# Altium PCB kursa4.PcbDoc
Units mm, origin at the board's own origin, x right, y up, seen from the top; angles counter-clockwise.
Board outline 105 x 80 mm, 2 copper layers (Top Layer, Bottom Layer); 32 components, 25 nets, 110 pads, 0 vias.
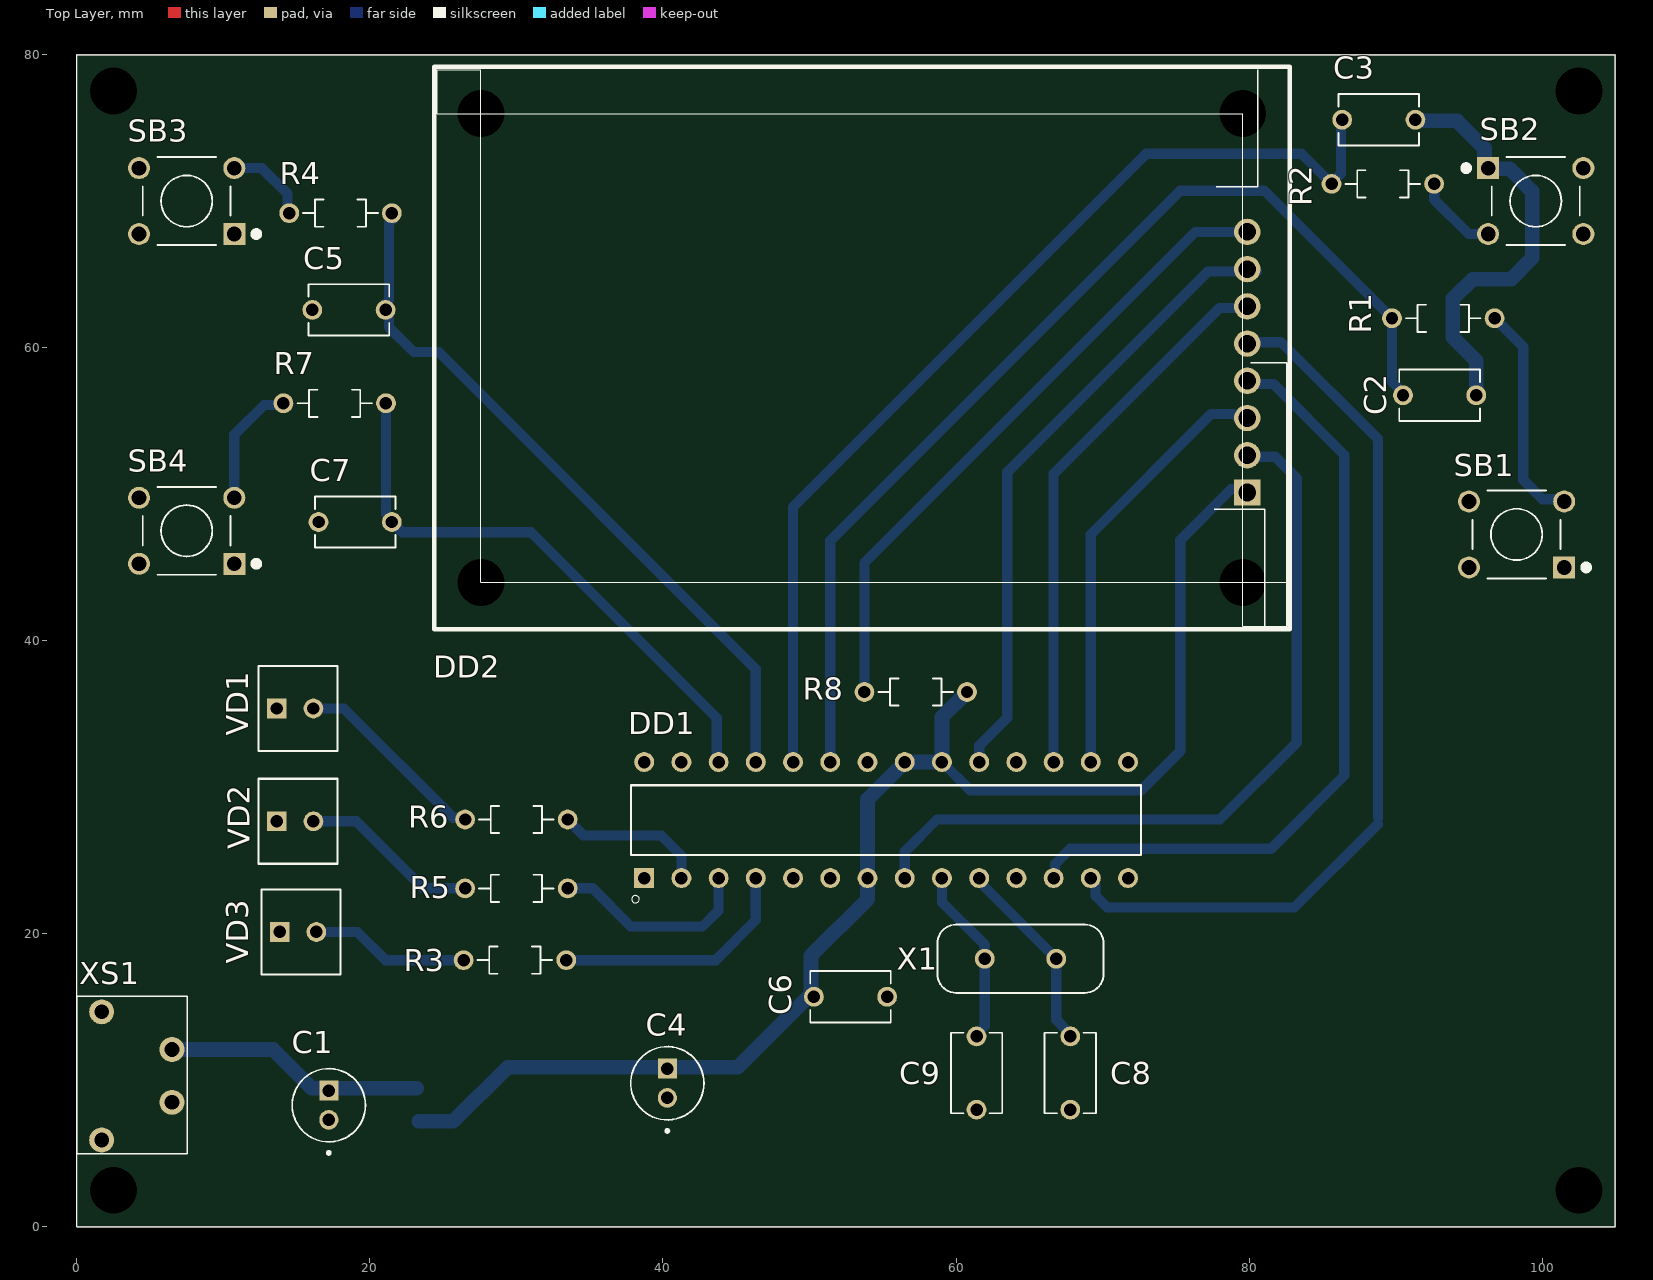
[diagram p0: Top Layer view]
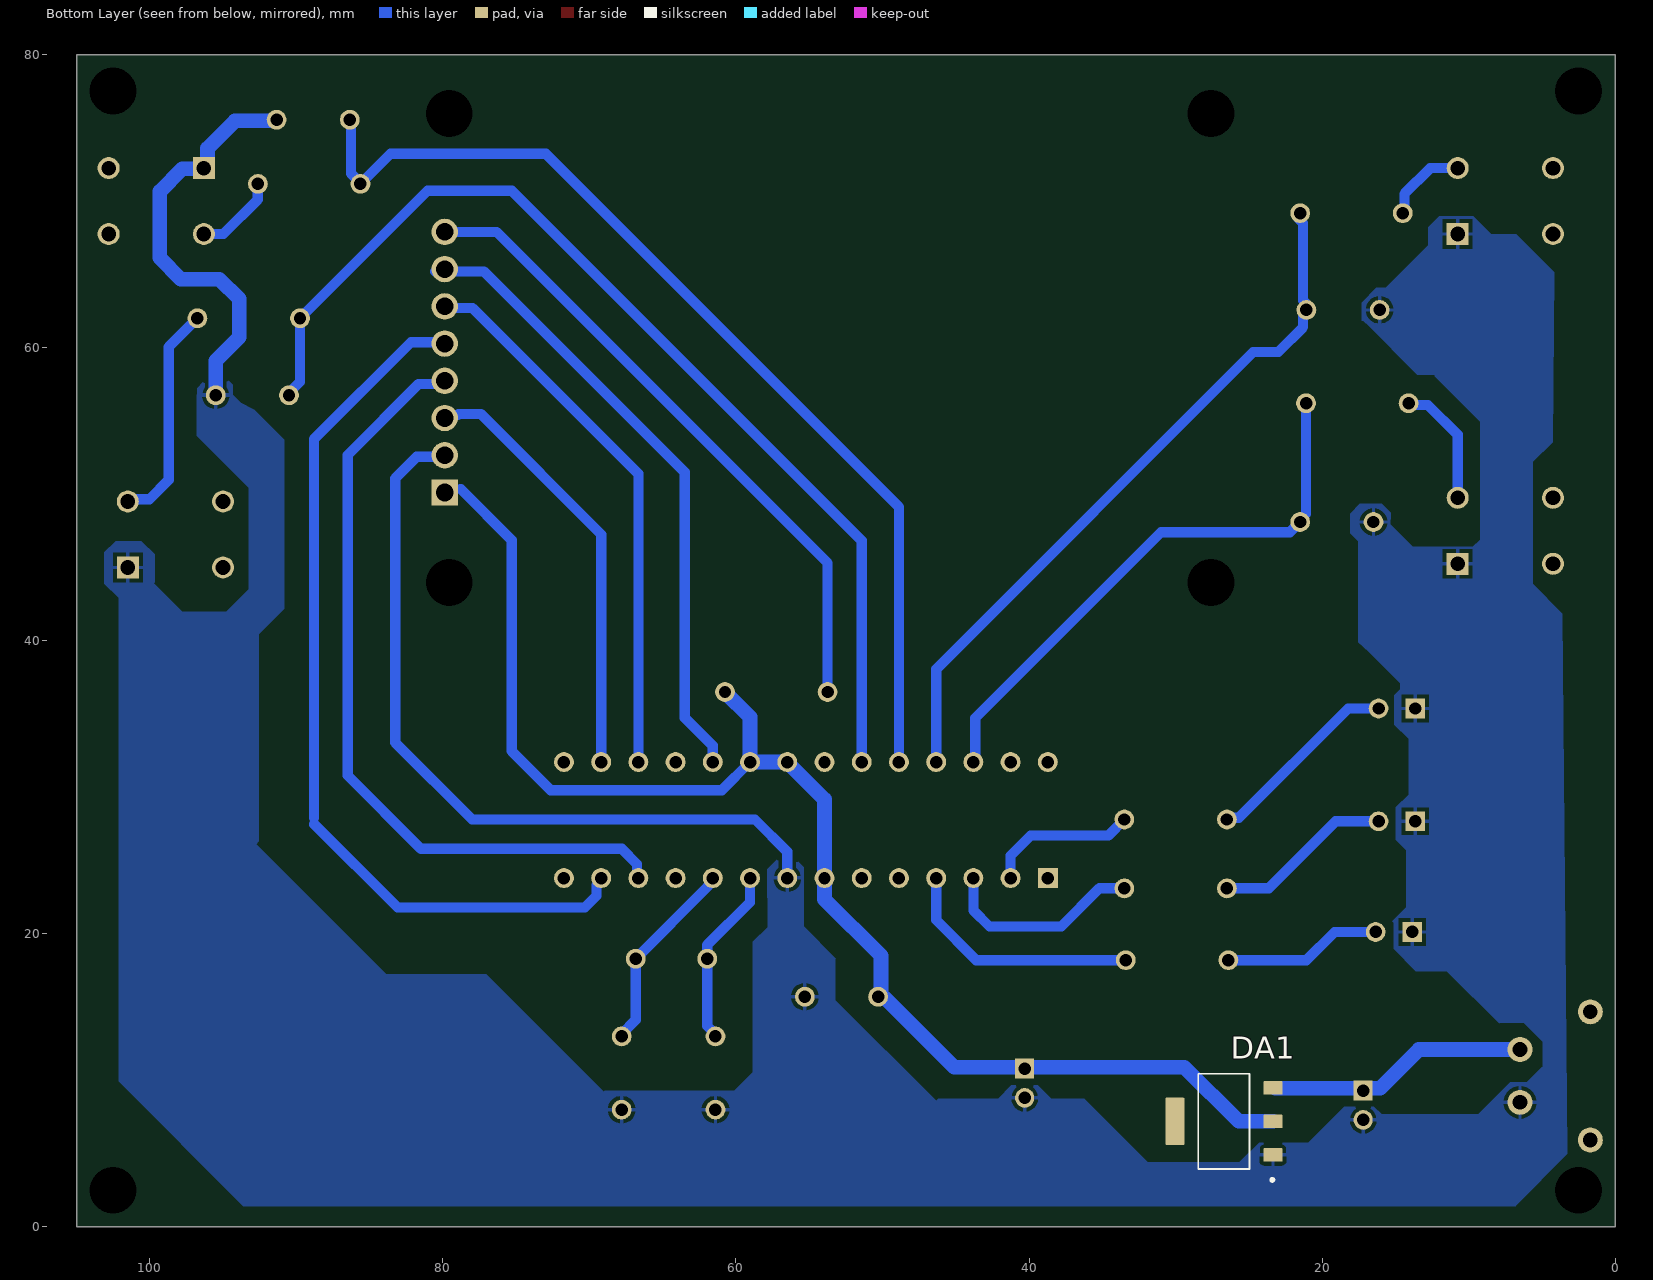
[diagram p1: Bottom Layer view, seen from below]

## Layer stack, top to bottom
Top Solder: solder mask 0.0102, Solder Resist, Dk 3.5
Top Layer: signal copper 0.0356
Dielectric 1: dielectric 0.32, FR-4, Dk 4.8
Bottom Layer: signal copper 0.0356
Bottom Solder: solder mask 0.0102, Solder Resist, Dk 3.5

## Board outline
0,0 0,80 105,80 105,0

## Design rules (kind name [scope] priority, off if disabled: settings)
Clearance [All] p1: gap=0.254 ignorepadtopadclearanceinfootprint=FALSE
PolygonConnect [All] p1: connectstyle=Relief reliefconductorwidth=0.254 reliefentries=4 polygonreliefangle="90 Angle" airgapwidth=0.254
RoutingVias [All] p1: holewidth=0.711 width=1.27 viastyle="Through Hole" minholewidth=0.711 minwidth=1.27 maxholewidth=0.711 maxwidth=1.27
SolderMaskExpansion [All] p1: expansion=0.102 istentingtop=FALSE
Width [All] p1: maxlimit=1 minlimit=0.7 preferedwidth=0.7
30 further rules are at their usual default settings.

## Classes and differential pairs
component class schema: C1 C2 C3 C4 C5 C6 C7 C8 C9 DA1 DD1 DD2 R1 R2 R3 R4 R5 R6 R7 R8 SB1 SB2 SB3 SB4 VD1 VD2 VD3 X1 XS1

## Components (designator, comment, footprint, x,y, rotation, side; value= is the part's Value field where it differs from the comment)
C1 "10 мкФ" CE 17.2,8.3 r90 top
C2 "0.1 мкФ" СC 93,56.75 r180 top
C3 "0.1 мкФ" СC 88.85,75.55 r180 top
C4 "22 мкФ" CE 40.3,9.8 r90 top
C5 "0.1 мкФ" СC 18.575,62.575 r0 top
C6 "0.1 мкФ" СC 52.8,15.7 r180 top
C7 "0.1 мкФ" СC 19,48.1 r0 top
C8 "22 пФ" СC 67.8,10.5 r90 top
C9 "22 пФ" СC 61.4,10.5 r90 top
DA1 "AMS1117-5.0" SOT223 26.7,7.2 r90 bottom
DD1 "ATmega328P-PU" ATMEGA328P-PU 55.23,27.76 r90 top
DD2 "ST7735" LCD 53.7,59.975 r0 top
R1 "10 кОм" R 93.25,62 r180 top
R2 "10 кОм" R 89.125,71.175 r180 top
R3 "620 Ом" R 29.9,18.2 r0 top
R4 "10 кОм" R 18,69.175 r0 top
R5 "620 Ом" R 30,23.1 r0 top
R6 "620 Ом" R 30,27.8 r0 top
R7 "10 кОм" R 17.6,56.2 r0 top
R8 "300 Ом" R 57.25,36.5 r0 top
SB1 "Button" Button 98.25,47.25 r180 top
SB2 "Button" Button 99.559,70 r0 top
SB3 "Button" Button 7.5,70 r180 top
SB4 "Button" Button 7.5,47.5 r180 top
VD1 "Led" LED 14.9,35.375 r180 top
VD2 "Led" LED 14.9,27.675 r180 top
VD3 "Led" LED 15.1,20.125 r180 top
X1 "16 МГц" Quartz 64.4,18.3 r180 top
XS1 "USB" TypeC 1.7,14.675 r270 top
ZBOAS262193074 "Comment" "BOASVIEWside:Вид платы сверху:1:0:0:0" 41.175,2338.7 r0 top
ZBOAS267794650 "Слой 2" "BOASVIEWlayer:Bottom Layer:1:1:32:1" 42.6,2378.725 r0 top (schematic designator fewf)
ZBOAS881497535 "Comment" "BOASVIEWdrill:Таблица отверстий:0:0:0:0" 194.025,2471.275 r0 top

## Footprints (in the part's own frame and the unit in brackets; to place one, negate y for a bottom-side part, rotate by r counter-clockwise, add the part's x,y. Pads: shape width x height; smd on the part's side, far side on the other; paste and mask are expansions set on the pad)
ATMEGA328P-PU [mm]
  rect 1.358x1.358 hole 0.85 unplated: 1(-3.96,16.51)
  round 1.358 hole 0.85 unplated: 2(-3.96,13.97) 3(-3.96,11.43) 4(-3.96,8.89) 5(-3.96,6.35) 6(-3.96,3.81) 7(-3.96,1.27) 8(-3.96,-1.27) 9(-3.96,-3.81) 10(-3.96,-6.35) 11(-3.96,-8.89) 12(-3.96,-11.43) 13(-3.96,-13.97) 14(-3.96,-16.51) 15(3.96,-16.51) 16(3.96,-13.97) 17(3.96,-11.43) 18(3.96,-8.89) 19(3.96,-6.35) 20(3.96,-3.81) 21(3.96,-1.27) 22(3.96,1.27) 23(3.96,3.81) 24(3.96,6.35) 25(3.96,8.89) 26(3.96,11.43) 27(3.96,13.97) 28(3.96,16.51)
  silkscreen extent -5.65,-17.4 2.38,17.4, body extent -5.05,-17.72 5.11,17.84, height 8.57
"BOASVIEWdrill:Таблица отверстий:0:0:0:0" [mm]
"BOASVIEWlayer:Bottom Layer:1:1:32:1" [mm]
"BOASVIEWside:Вид платы сверху:1:0:0:0" [mm]
Button [mm]
  rect 1.5x1.5 hole 1 unplated: 1(-3.25,2.25)
  round 1.5 hole 1 unplated: 2(-3.25,-2.25) 3(3.25,2.25) 4(3.25,-2.25)
  silkscreen extent -4.95,-3 3,3, body extent -3.95,-3 3.95,3, height 9.5
CE [mm] "50v 1uF"
  rect 1.35x1.3 hole 0.85 unplated: 1(1,0)
  oval 1.35x1.3 hole 0.85 unplated: 2(-1,0)
  silkscreen extent -3.35,-2.5 2.5,2.5, body extent -2.5,-2.49 2.5,2.49, height 12
LCD [mm]
  rect 1.8x1.8 hole 1.2 unplated paste-2539.97 mask+0.102: 1(26.175,-9.86)
  round 1.8 hole 1.2 unplated paste-2539.97 mask+0.102: 2(26.175,-7.32) 3(26.175,-4.78) 4(26.175,-2.24) 5(26.175,0.3) 6(26.175,2.84) 7(26.175,5.38) 8(26.175,7.92)
  round 1.3 hole 3.2 unplated paste-2539.97 mask+0.102: 9(25.864,-15.998) 10(-26.116,15.998) 11(-26.116,-15.998) 12(25.864,15.998)
  silkscreen extent -29.3,-19.2 29.07,19.2, body extent -29.1,-19.03 28.9,18.97, height 7
LED [mm]
  rect 1.35x1.35 hole 0.85 unplated paste-2539.97 mask+0.102: 1(1.25,0)
  round 1.35 hole 0.85 unplated paste-2539.97 mask+0.102: 2(-1.25,0)
  silkscreen extent -2.9,-2.9 2.5,2.9, body extent -2.9,-2.9 2.5,2.9, height 9.6
Quartz [mm]
  round 1.35 hole 0.85 unplated: 1(-2.44,0) 2(2.44,0)
  silkscreen extent -5.68,-2.33 5.68,2.33, body extent -5.68,-2.32 5.68,2.32, height 3.5
R [mm]
  round 1.35 hole 0.85 unplated: 1(-3.5,0) 2(3.5,0)
  silkscreen extent -2.55,-0.92 2.55,0.92, body extent -3.72,-0.92 3.72,0.92, height 1.85
SOT223 [mm]
  rrect15% 0.93x1.31 smd: 1(-2.29,-3.345) 2(0,-3.345) 3(2.29,-3.345)
  rrect15% 3.24x1.31 smd: 4(0,3.345)
  silkscreen extent -4.09,-3.4 3.25,1.75, body extent -3.25,-3.5 3.25,3.5, height 1.8
TypeC [mm]
  round 1.7 hole 1 unplated: BODY(0,0) BODY(8.75,0) GND(6.175,4.8) VCC(2.575,4.8)
  silkscreen extent -1.07,-1.72 9.69,5.84, body extent -0.12,-1.5 8.83,4.93, height 3.1
СC [mm]
  round 1.35 hole 0.85 unplated: 1(-2.5,0) 2(2.5,0)
  silkscreen extent -2.75,-1.75 2.75,1.75, body extent -2.75,-1.75 2.75,1.75, height 6

## Part data
C1 C4: library part CE
C2 C3 C5 C6 C7 C8 C9: library part C
DA1: library part Stabilizator
DD2: library part LCD
R1 R2 R3 R4 R5 R6 R7 R8: library part Resistor
VD1 VD2 VD3: "RED"
X1: library part Quartz

## Free pads (board coordinates)
  round 1.3 hole 3.2 unplated paste-2539.97 mask+0.102: 13(102.5,2.5) 14(102.5,77.5) 15(2.5,77.5) 16(2.5,2.5)

## Nets (pads, with @x,y where several pads share a name; then routed paths per layer and width w, separated by ;. In a path a pad name is that pad's centre, name@x,y a point inside that pad or via, vN(x,y) a via of type N, cw(c..) or ccw(c..) an arc to the next point about the centre after c; other vN are vias at no path point)
+5V: C4.1 C6.2 DA1.2 DD1.7 DD1.20 DD1.21 DD2.1 R8.2 | length 94.7
  Bottom Layer w0.7: DD1.20 60.96,29.8 72.632,29.8 75.3,32.468 75.3,46.865 78.785,50.35
  Bottom Layer w1: DA1.2 25.7,7.2 29.4,10.9 45.1,10.9 49.843,15.643 50.243,15.643 C6.2 50.3,15.781 50.1,15.981 50.1,18.5 53.96,22.36 DD1.7 53.96,29.18 DD1.21 DD1.20 59.04,34.79 R8.2
DC: DD1.13 DD2.5 | length 61.3
  Bottom Layer w0.7: DD1.13 69.2,23.622 69.517,23.305 69.517,22.583 70.3,21.8 83.1,21.8 88.775,27.475 ; DD2.5@79.373,60.375 82.175,60.375 88.8,53.75 88.8,27.9
GND: C1.2 C2.1 C3.1 C4.2 C5.1 C6.1 C7.1 C8.1 C9.1 DA1.1 DD1.8 DD2.2 SB1.1 SB2.1 SB3.1 SB4.1 VD1.1 VD2.1 VD3.1 XS1.GND | length 83
  Bottom Layer w0.7: DD1.8 56.5,25.6 58.7,27.8 78,27.8 83.25,33.05 83.25,51.075 81.775,52.55 DD2.2@79.525,52.55
  Bottom Layer w1: C3.1 91.407,75.493 94.182,75.493 96.06,73.615 96.06,72.499 96.359,72.2 97.775,72.2 99.325,70.65 99.325,66.125 97.875,64.675 95.25,64.675 93.9,63.325 93.9,60.7 95.5,59.1 C2.1
MOSI: DD1.17 DD2.6 | length 38.1
  Bottom Layer w0.7: DD1.17 66.66,51.385 77.975,62.7 DD2.6@80.404,62.7
NetC1_1: C1.1 DA1.3 XS1.VCC | length 18
  Bottom Layer w1: XS1.VCC@6.465,12.1 13.4,12.1 16.05,9.45 17.05,9.45 C1.1 17.35,9.45 17.931,9.45 17.936,9.455 DA1.3@23.2,9.455
NetC2_2: C2.2 DD1.23 R1.2 | length 72.5
  Bottom Layer w0.7: DD1.23 51.42,46.82 75.3,70.7 81.05,70.7 R1.2 89.75,57.662 90.5,56.912 C2.2
NetC3_2: C3.2 DD1.24 R2.2 | length 69.5
  Bottom Layer w0.7: DD1.24 48.88,49.13 72.975,73.225 83.575,73.225 R2.2 ; R2.2@85.625,71.235 86.275,71.885 C3.2@86.275,75.502
NetC5_2: C5.2 DD1.25 R4.2 | length 48.9
  Bottom Layer w0.7: R4.2@21.65,69 21.65,68.95 21.65,68.838 21.3,68.488 21.3,63.224 21.19,63.114 21.19,62.77 21.3,62.66 21.3,61.4 23,59.7 24.7,59.7 46.34,38.06 DD1.25
NetC7_2: C7.2 DD1.26 R7.2 | length 39
  Bottom Layer w0.7: R7.2 21.1,48.662 21.5,48.262 C7.2 21.51,48.1 22.21,47.4 31,47.4 43.674,34.726 43.674,31.846 DD1.26
NetC8_2: C8.2 DD1.10 X1.1 | length 13.4
  Bottom Layer w0.7: DD1.10 61.58,23.622 61.909,23.293 61.909,23.231 X1.1 66.84,14.122 67.8,13.162 C8.2
NetC9_2: C9.2 DD1.9 X1.2 | length 12.2
  Bottom Layer w0.7: DD1.9 59.04,22.16 61.96,19.24 61.96,13.71 61.4,13.15 C9.2
NetDD1_2: DD1.2 R6.2 | length 10.3
  Bottom Layer w0.7: R6.2 34.6,26.7 39.9,26.7 41.26,25.34 DD1.2
NetDD1_3: DD1.3 R5.2 | length 14
  Bottom Layer w0.7: R5.2 35.2,23.1 37.8,20.5 42.7,20.5 43.8,21.6 DD1.3
NetDD1_4: DD1.4 R3.2 | length 16.9
  Bottom Layer w0.7: R3.2 43.6,18.2 46.34,20.94 DD1.4
NetDD2_8: DD2.8 R8.1 | length 44.4
  Bottom Layer w0.7: R8.1@53.75,36.34 53.75,45.3 76.345,67.895 DD2.8
NetR1_1: R1.1 SB1.2 | length 15.2
  Bottom Layer w0.7: R1.1 98.7,60.05 98.7,50.975 100.022,49.653 101.347,49.653 SB1.2
NetR2_1: R2.1 SB2.2 | length 5.7
  Bottom Layer w0.7: R2.1 92.625,70.1 94.975,67.75 SB2.2
NetR3_1: R3.1 VD3.2 | length 10.8
  Bottom Layer w0.7: VD3.2 19.15,20.125 21.075,18.2 R3.1
NetR4_1: R4.1 SB3.2 | length 5.7
  Bottom Layer w0.7: SB3.2 12.625,72.25 14.385,70.49 14.385,69.29 R4.1
NetR5_1: R5.1 VD2.2 | length 12.2
  Bottom Layer w0.7: VD2.2 19.075,27.675 23.65,23.1 R5.1
NetR6_1: R6.1 VD1.2 | length 13.5
  Bottom Layer w0.7: VD1.2 18.225,35.375 25.685,27.915 26.385,27.915 R6.1
NetR7_1: R7.1 SB4.2 | length 8.5
  Bottom Layer w0.7: SB4.2 10.75,54.05 12.785,56.085 13.985,56.085 R7.1
RST: DD1.12 DD2.4 | length 53.7
  Bottom Layer w0.7: DD1.12 66.753,23.893 66.753,24.753 67.8,25.8 81.5,25.8 86.5,30.8 86.5,52.675 81.65,57.525 DD2.4@79.892,57.525
SCK: DD1.19 DD2.7 | length 43.3
  Bottom Layer w0.7: DD1.19 61.58,32.83 63.5,34.75 63.5,51.5 77.2,65.2 DD2.7@80.536,65.2
SS: DD1.16 DD2.3 | length 29.7
  Bottom Layer w0.7: DD1.16 69.2,47.25 77.425,55.475 78.915,55.475 78.984,55.405 79.665,55.405 DD2.3
pads on no net: DA1.4 DD1.1 DD1.5 DD1.6 DD1.11 DD1.14 DD1.15 DD1.18 DD1.22 DD1.27 DD1.28 DD2.9 DD2.10 DD2.11 DD2.12 SB1.3 SB1.4 SB2.3 SB2.4 SB3.3 SB3.4 SB4.3 SB4.4 XS1.BODY

## Polygon pours and split planes (outlines as drawn)
GND on Bottom Layer "GND_L02_P000" (solid, pour order 0): 93.806,56.252 94.325,56.771 94.325,57.475 94.35,57.475 94.725,57.85 96.15,57.85 96.775,57.225 96.8,56.4 96.8,53.975 93.25,50.425 93.25,43.5 94.775,41.975 97.775,41.975 99.725,43.925 99.675,43.975 99.675,45.9 100.575,46.8 102.325,46.8 103.1,46.025 103.1,43.875 102.125,42.925 102.125,9.925 93.625,1.425 6.8,1.425 6.8,1.441 3.266,4.975 3.6,41.85 5.625,43.875 5.625,52.2 4.275,53.55 4.15,65.15 6.75,67.75 8.475,67.75 9.675,68.95 12.025,68.95 12.75,68.225 12.75,67 15.675,64.075 16.3,64.075 17.3,63.075 17.3,61.825 17.2,61.825 17.025,61.65 17,61.65 13.5,58.15 12.325,58.15 12.325,58.05 9.225,54.95 9.225,46.9 9.725,46.4 13.812,46.413 15.338,47.938 15.338,48.238 15.35,48.25 15.325,48.275 15.325,48.725 15.95,49.35 17.425,49.35 18.1,48.675 18.075,48.65 18.075,47.325 17.55,46.8 17.55,39.9 16.837,39.262 14.663,37.088 14.663,36.687 15.075,36.275 15.075,34.275 14.1,33.3 14.1,29.5 14.975,28.625 14.962,28.337 14.975,28.325 14.975,26.425 14.25,25.7 14.25,21.825 15.225,20.85 15.125,20.75 15.125,18.975 13.6,17.45 11.45,17.425 7.912,13.887 6.25,13.925 4.95,12.625 4.95,10.9 5,10.9 6.025,9.875 7.15,9.875 9.35,7.675 15.175,7.675 15.187,7.663 15.2,7.675 15.95,7.675 16.475,8.2 18.5,8.2 19.375,7.3 20.95,5.725 20.975,5.75 24.3,5.75 25.65,4.413 31.912,4.413 31.912,4.412 36.25,8.75 38.5,8.75 39.4,9.65 41.2,9.65 42.1,8.75 46.2,8.75 46.35,8.6 53.225,15.475 53.225,18.25 53.175,18.3 55.387,20.512 55.387,24.537 56.025,25.175 57.1,25.175 57.875,24.4 57.837,20.463 58.85,19.45 58.85,10.55 60.112,9.287 68.963,9.287 69.025,9.225 77.025,17.225 83.85,17.225 92.75,26.125 92.575,26.3 92.575,40.425 90.825,42.175 90.825,53.7 92.875,55.75

## Silkscreen, mask and mechanical layers (free items; w line width, h text height)
Top Overlay:
  the board outline again, w0.001
Mechanical 7:
  text "BOASFORMAT|А3|1|0|883070867|165354330|1000000000|1:1|" at -25.4,2514.6 h0
  text "DimH|-41387795|-39370|68159449|978011811|-19232284|5423228|1||||js12|False|False|False|False|2" at 147.725,2458.75 h0
  text "DimV|-19685|-31564961|68120079|978001969|6427165|-26486221|1||||js12|False|False|False|False|2" at 147.625,2458.725 h0
  text "DimRoughness|0|0|-59311024|-931033465|1|||||0|0|False|2" at 125.25,2339.425 h0
  text "DimV|0|-344488|67559055|931003937|3848425|-462598|1||||js12|False|False|False|False|2" at 146.2,2339.35 h0
  text "DimRoughness|0|0|-53533465|-930590551|1|||||0|0|False|2" at 124.15,2338.33 h0 r180
  text "*Размеры для справок / 1.  Общие допуски формы и расположения - ГОСТ 30893.2-2002 - Н. / 2.  Шаг координатной сетки 0,01 мм. / 3. Плату изготовить химическим негативным методом. / 4. Класс точности платы - 3 по ГОСТ Р 33429-2009, минимальная ширина проводника - 0,25 мм, минимальный зазор - 0,25 мм. / 5. Параметры отверстий платы приведены в таблице. / 6. Плата должна соответствовать ГОСТ 23752-79, группа жесткости 1. / 7. Финишное покрытие металлизированных поверхностей меди по ГОСТ 9301-86 толщиной не менее 500мкм припоем ПОС-61 ГОСТ 21930-76. / 8. Контроль оптико-визуальным методом при 16-кратном увеличении по ГОСТ 234 79-79. / 9. Контроль функциональный по ГОСТ 23752.1-92 методом прозвонки. / 10.  Остальные технические требования по 0СТ4 ГО 070 014 - 75." at 205.75,2292.525 h6
  text "Группа ИУ4-63Б" at 351.536,2224.226 h5
  text "SET2|Superlayer=MechanicalLayer7|Wsuperlayer=MechanicalLayer8|Layergrid=MechanicalLayer9|Werase=MechanicalLayer11|Layermark=MechanicalLayer12|Layerstamp=MechanicalLayer13|Gridline=0,18|Boardline=0,6|Contourpolygonline=0,6|PcbGridStep=2,5|PcbGridNumbering=True|PcbGridCleareanceAtView=0|PcbGridNumberEach=l4|PcbGridLineEach=l2|PcbGridCountSecondaryStrip=1|PcbGridEnabledStrip=True|PcbGridHorizontal90=False|PcbGridWhiteAreaBeforeText=True|PcbSignalGridEnabled=True|PcbSignalShowBukva=True|RealSignalLayerNames=False|PcbGridTextsEnabledBothSide=l2|PcbGridEnabledBothSide=l2|PcbPolarGridEnabled=False|PcbPolarGridAngleStep=10|PcbPolarGridRadialStep=10|PcbPolarGridCenterPcbGrid=False|SilkShowPad=True|SilkViewName=Слой маркировки|SilkShowHole=True|SilkShowAxis=True|SilkShowBukva=True|SilkShowGrid=False|SolderShowGrid=False|SolderViewName=Слой маски|SolderShowAxis=False|SolderShowBukva=False|MainViewShowGrid=False|MainViewMinDiameterHoles=2|MainViewUseShapesDrill=False|ShowBukvaOnSboky=True|ShowBukvaViews=True|Density=2,2|CustomHoleSizeFactor=1|PcbDoubleLineHeader=False|PcbAccuracy=a4|TableName=Таблица 1 - данные отверстий|RazrezWidth=100|RealLayerNames=False|RazrezShowBukva=False|RazrezBukva=В-В|Sher=Rz 80|Asstoplayer=MechanicalLayer1|Asstoplayer2=None|Assbottomlayer=MechanicalLayer2|Assbottomlayer2=None|AssMinDiameterHoles=2|AssDim=False|AssMech=False|AssSilk=False|AssComponentSilk=False|AssFreeSilk=False|AssSmdPads=False|AssGridEnable=False|AssShowBukva=True|Mirror=Horisontal|PcbGridFontSize=5|PcbGridCenterZero=False|TTStampDistance=12|MainFontSize=5|PolyShtrihEnable=True|RegionShtrihEnable=False|PolyStep=2|PcbDrillDrawingGridEnabled=False|PcbDrillDrawingViewName=Слой сверловки|PcbDrillDrawingShowBukva=False|PcbDrillDrawingShowAxis=False|PcbSignalLayersUseDrill=True|PcbSignalLayersUseWhiteHoles=True|PcbSignalLayersUseShapesDrill=False|PcbSignalLayersShowAxis=False|Thinline=0,18|Basicline=0,6" at -25.4,-25.375 h0
  text "STAMP|Материал2|СФ-2Н-35Г ГОСТ 10315-78" at -25.4,-25.4 h0
  text "STAMP|Материал1|Стеклотекстолит" at -25.4,-25.4 h0
  text "STAMP|Проверил|Чистяков М.Г." at -25.4,-25.4 h0
  text "STAMP|Разработал|Черепнин М.А." at -25.4,-25.4 h0
  text "STAMP|Компания2|Кафедра ИУ4" at -25.4,-25.4 h0
  text "STAMP|Компания1|МГТУ им. Н.Э. Баумана" at -25.4,-25.4 h0
  text "STAMP|Масса|" at -25.4,-25.4 h0
  text "STAMP|Первичная применяемость|ИУ4 11.03.03.25.06.63.22.001" at -25.4,-25.4 h0
  text "STAMP|ТипДокумента|Печатная плата" at -25.4,-25.4 h0
  text "STAMP|Обозначение|ИУ4 11.03.03.25.06.63.22.002" at -25.4,-25.4 h0
  text "STAMP|Наименование2|микроконтроллера ATmega328P-PU" at -25.4,-25.4 h0
  text "STAMP|Наименование1|Игра \"Пинг-понг\" на базе" at -25.4,-25.4 h0
  text "BOASVIADRILLTABLE:" at -25.4,-25.4 h0
  text "2BOASDRILLTABLE:none,334646,Нет,70,True,|none,393701,Нет,20,True,|none,472441,Нет,8,True,|circle0101,1259843,Нет,8,True," at -25.4,-25.4 h0
Mechanical 8:
  region: 155.883,2338.383 155.236,2336.69 154.745,2332.976 155.879,2332.975 155.88,2333.907 155.317,2333.475 155.972,2338.382
  region: 156.067,2338.383 156.714,2336.69 157.205,2332.976 156.071,2332.975 156.07,2333.907 156.633,2333.475 155.978,2338.382
  region: 156.067,2339.442 156.714,2341.135 157.205,2344.849 156.071,2344.85 156.07,2343.918 156.633,2344.35 155.978,2339.443
  region: 155.883,2339.442 155.236,2341.135 154.745,2344.849 155.879,2344.85 155.88,2343.918 155.317,2344.35 155.972,2339.443
  region: 147.633,2472.617 145.94,2473.264 142.226,2473.755 142.225,2472.621 143.157,2472.62 142.725,2473.183 147.632,2472.528
  region: 147.633,2472.433 145.94,2471.786 142.226,2471.295 142.225,2472.429 143.157,2472.43 142.725,2471.867 147.632,2472.522
  region: 42.692,2472.433 44.385,2471.786 48.099,2471.295 48.1,2472.429 47.168,2472.43 47.6,2471.867 42.693,2472.522
  region: 42.692,2472.617 44.385,2473.264 48.099,2473.755 48.1,2472.621 47.168,2472.62 47.6,2473.183 42.693,2472.528
  region: 164.042,2378.642 164.689,2380.335 165.18,2384.049 164.046,2384.05 164.045,2383.118 164.608,2383.55 163.953,2378.643
  region: 163.858,2378.642 163.211,2380.335 162.72,2384.049 163.854,2384.05 163.855,2383.118 163.292,2383.55 163.947,2378.643
  region: 163.858,2458.633 163.211,2456.94 162.72,2453.226 163.854,2453.225 163.855,2454.157 163.292,2453.725 163.947,2458.632
  region: 164.042,2458.633 164.689,2456.94 165.18,2453.226 164.046,2453.225 164.045,2454.157 164.608,2453.725 163.953,2458.632
Mechanical 9:
  circle w0.18: c124.15,2335 r1.67
  circle w0.18: c125.25,2342.755 r1.67
  region: 155.975,2338.475 156.633,2333.475 155.975,2333.975 155.317,2333.475
  region: 155.975,2339.35 155.317,2344.35 155.975,2343.85 156.633,2344.35
  region: 147.725,2472.525 142.725,2471.867 143.225,2472.525 142.725,2473.183
  region: 42.6,2472.525 47.6,2473.183 47.1,2472.525 47.6,2471.867
  region: 163.95,2378.55 163.292,2383.55 163.95,2383.05 164.608,2383.55
  region: 163.95,2458.725 164.608,2453.725 163.95,2454.225 163.292,2453.725
  lines w0.18: 42.6,2458.65 42.6,2473.525 ; 42.6,2472.525 147.725,2472.525 ; 119.24,2329.83 124.15,2338.33 127.04,2333.33 ; 122.36,2344.425 125.25,2339.425 130.16,2347.925 ; 146.2,2338.475 156.975,2338.475 ; 146.2,2339.35 156.975,2339.35 ; 147.575,2458.725 164.95,2458.725 ; 147.625,2378.55 164.95,2378.55 ; 147.725,2458.75 147.725,2473.525 ; 155.975,2318.891 155.975,2347.35 ; 163.95,2378.55 163.95,2458.725
  text "105±0,3" at 88.935,2475.055 h7.68
  text "80±0,3" at 161.42,2412.904 h7.68 r90
  text "1,5*" at 153.445,2323.011 h7.68 r90
Mechanical 13:
  lines w0.18: 204.6,2227.6 269.6,2227.6 ; 204.6,2232.6 269.6,2232.6 ; 204.6,2237.6 269.6,2237.6 ; 204.6,2242.6 269.6,2242.6 ; 204.6,2247.6 269.6,2247.6 ; 204.6,2262.6 269.6,2262.6 ; 204.6,2267.6 269.6,2267.6 ; 204.6,2272.6 269.6,2272.6 ; 344.56,2242.6 344.56,2257.6 ; 349.58,2242.6 349.58,2257.6 ; 366.3,2496.7 369.4,2491.3 375,2501.1 ; -25.4,2217.6 394.6,2217.6 394.6,2514.6 -25.4,2514.6 -25.4,2217.6
  lines w0.6: -17.4,2247.6 -5.4,2247.6 ; -17.4,2282.6 -5.4,2282.6 ; -17.4,2307.6 -5.4,2307.6 ; -17.4,2332.6 -5.4,2332.6 ; -17.4,2449.6 -5.4,2449.6 ; -12.4,2222.6 -12.4,2367.6 ; -12.4,2389.6 -12.4,2509.6 ; -5.4,2367.6 -17.4,2367.6 -17.4,2222.6 -5.4,2222.6 ; -5.4,2389.6 -17.4,2389.6 -17.4,2509.6 -5.4,2509.6 ; -5.4,2495.6 64.6,2495.6 64.6,2509.6 ; 204.6,2222.6 204.6,2277.6 389.6,2277.6 ; 204.6,2252.6 269.6,2252.6 ; 204.6,2257.6 269.6,2257.6 ; 211.6,2252.6 211.6,2277.6 ; 221.6,2222.6 221.6,2277.6 ; 244.6,2222.6 244.6,2277.6 ; 259.6,2222.6 259.6,2277.6 ; 269.6,2222.6 269.6,2277.6 389.6,2277.6 ; 269.6,2237.6 339.6,2237.6 389.6,2237.6 ; 269.6,2262.6 389.6,2262.6 ; 326.6,2498.6 331.6,2489.6 339.2,2503.6 ; 339.3,2503.6 381.6,2503.6 ; 339.6,2222.6 339.6,2262.6 ; 339.6,2242.6 389.6,2242.6 ; 339.6,2257.6 354.6,2257.6 389.6,2257.6 ; 354.6,2242.6 354.6,2262.6 ; 360.17,2237.6 360.17,2242.6 ; 371.6,2242.6 371.6,2262.6 ; 389.6,2285.6 389.6,2277.6 ; -5.4,2222.6 389.6,2222.6 389.6,2509.6 -5.4,2509.6 ; -5.4,2222.6 -5.4,2509.6
  text "ИУ4 11.03.03.25.06.63.22.002" at 64.097,2505.04 h8.53 r180
  text "Rz 80" at 339.3,2491.3 h10.75
  text "(" at 362.6,2491.3 h10.75
  text ")" at 373.6,2491.3 h10.75
  text "Перв. примен." at -13.362,2469.579 h5.38 r90
  text "ИУ4 11.03.03.25.06.63.22.001" at -7.362,2458.107 h5.38 r90
  text "Справ. №" at -13.362,2412.104 h5.38 r90
  text "Подп. и дата" at -13.362,2340.171 h5.38 r90
  text "Инв. № дубл." at -13.362,2310.686 h5.38 r90
  text "Взам. инв. №" at -13.362,2285.708 h5.38 r90
  text "ИУ4 11.03.03.25.06.63.22.002" at 286.115,2267.024 h10.75
  text "Лит." at 343.794,2258.562 h5.38
  text "Масса" at 358.516,2258.562 h5.38
  text "Масштаб" at 373.436,2258.562 h5.38
  text "Подп. и дата" at -13.362,2255.671 h5.38 r90
  text "Игра \"Пинг-понг\" на базе" at 276.375,2255.403 h7.68
  text "Изм." at 205.169,2253.562 h5.38
  text "Лист" at 212.458,2253.562 h5.38
  text "№ докум." at 226.6,2253.562 h5.38
  text "Подп." at 248.373,2253.562 h5.38
  text "Дата" at 260.393,2253.562 h5.38
  text "Разраб." at 205.133,2248.371 h5.38
  text "Черепнин М.А." at 222.28,2248.371 h5.38
  text "1:1" at 378.329,2247.903 h7.68
  text "микроконтроллера ATmega328P-PU" at 270.104,2247.703 h6.63
  text "Пров." at 205.133,2243.371 h5.38
  text "Чистяков М.Г." at 222.28,2243.371 h5.38
  text "Печатная плата" at 291.735,2240.062 h5.38
  text "Т.контр." at 205.133,2238.371 h5.38
  text "Лист" at 341.042,2238.371 h5.38
  text "Листов" at 362.085,2238.371 h5.38
  text "1" at 382,2238.371 h5.38
  text "МГТУ им. Н.Э. Баумана" at 348.85,2233.25 h5
  text "Стеклотекстолит" at 290.095,2231.562 h5.38
  text "Кафедра ИУ4" at 355.45,2229.075 h5
  text "Н.контр." at 205.133,2228.371 h5.38
  text "Инв. № подл." at -13.362,2225.686 h5.38 r90
  text "СФ-2Н-35Г ГОСТ 10315-78" at 284.052,2225.062 h5.38
  text "Утв." at 205.133,2223.371 h5.38
  text "Копировал" at 280.133,2218.371 h5.38
  text "Формат А3" at 360.877,2218.371 h5.38

## Text inside footprints (layer, text, board x,y; h text height)
ZBOAS267794650: Mechanical 7 "100" at 138.534,2369.847 h8.75; Mechanical 7 "90" at 129.425,2369.847 h8.75; Mechanical 7 "80" at 119.198,2369.847 h8.75; Mechanical 7 "70" at 109.603,2369.847 h8.75; Mechanical 7 "60" at 99.198,2369.847 h8.75; Mechanical 7 "50" at 89.247,2369.847 h8.75; Mechanical 7 "40" at 79.251,2369.847 h8.75; Mechanical 7 "30" at 69.247,2369.847 h8.75; Mechanical 7 "20" at 59.068,2369.847 h8.75; Mechanical 7 "10" at 50.142,2369.847 h8.75; Mechanical 7 "0" at 40.806,2369.847 h8.75; Mechanical 7 "80" at 31.796,2456.222 h8.75; Mechanical 7 "70" at 32.606,2446.222 h8.75; Mechanical 7 "60" at 31.796,2436.222 h8.75; Mechanical 7 "50" at 31.893,2426.222 h8.75; Mechanical 7 "40" at 31.901,2416.222 h8.75; Mechanical 7 "30" at 31.893,2406.222 h8.75; Mechanical 7 "20" at 31.537,2396.222 h8.75; Mechanical 7 "10" at 33.683,2386.222 h8.75; Mechanical 7 "0" at 35.012,2376.222 h8.75
ZBOAS881497535: Mechanical 12 "-" at 296.702,2426.078 h7.68; Mechanical 12 "Нет" at 336.604,2426.078 h7.68; Mechanical 12 "3,2" at 248.12,2426.078 h7.68; Mechanical 12 "8" at 367.107,2426.078 h7.68; Mechanical 12 "1,8" at 295.262,2434.078 h7.68; Mechanical 12 "Нет" at 336.604,2434.078 h7.68; Mechanical 12 "1,2" at 248.905,2434.078 h7.68; Mechanical 12 "8" at 367.107,2434.078 h7.68; Mechanical 12 "1,5" at 295.227,2442.078 h7.68; Mechanical 12 "Нет" at 336.604,2442.078 h7.68; Mechanical 12 "1" at 250.668,2442.078 h7.68; Mechanical 12 "20" at 365.504,2442.078 h7.68; Mechanical 12 "1,4" at 295.6,2450.078 h7.68; Mechanical 12 "Нет" at 336.604,2450.078 h7.68; Mechanical 12 "0,85" at 246.698,2450.078 h7.68; Mechanical 12 "70" at 365.973,2450.078 h7.68; Mechanical 12 "отв." at 364.267,2457.828 h7.68; Mechanical 12 "Кол." at 364.488,2465.328 h7.68; Mechanical 12 "металлизации" at 325.14,2457.828 h7.68; Mechanical 12 "Наличие" at 332.057,2465.328 h7.68; Mechanical 12 "площадки, мм" at 282.835,2457.828 h7.68; Mechanical 12 "Диаметр контактной" at 273.525,2465.328 h7.68; Mechanical 12 "мм" at 250.011,2457.828 h7.68; Mechanical 12 "Диаметр отв.," at 237.558,2465.328 h7.68; Mechanical 12 "обозначение отв." at 195.139,2457.828 h7.68; Mechanical 12 "Условное" at 203.755,2465.328 h7.68; Mechanical 12 "Таблица 1 - данные отверстий" at 194.025,2472.775 h7.68